# Altium PCB Pcb1.PcbDoc
Units mm, origin at the board's own origin, x right, y up, seen from the top; angles counter-clockwise.
Board outline 25.4 x 57.15 mm, 2 copper layers (Top Layer, Bottom Layer), stack 1.569 mm thick; 49 components, 56 nets, 183 pads, 195 vias.
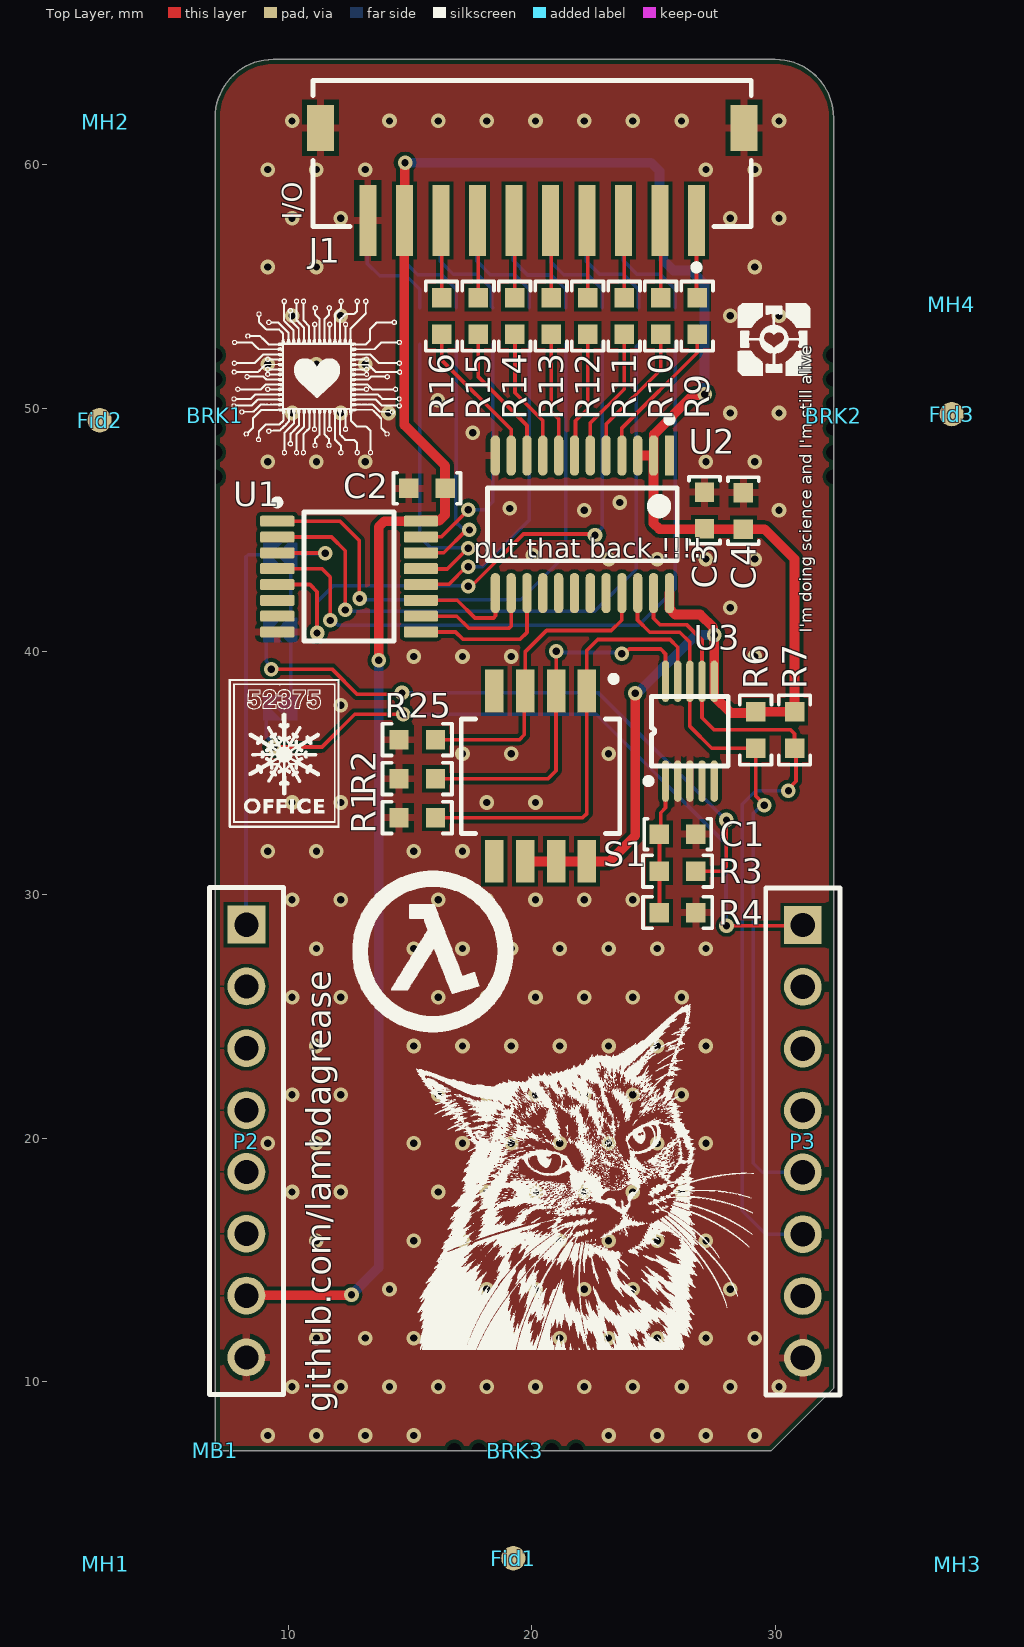
[diagram p0: Top Layer view]
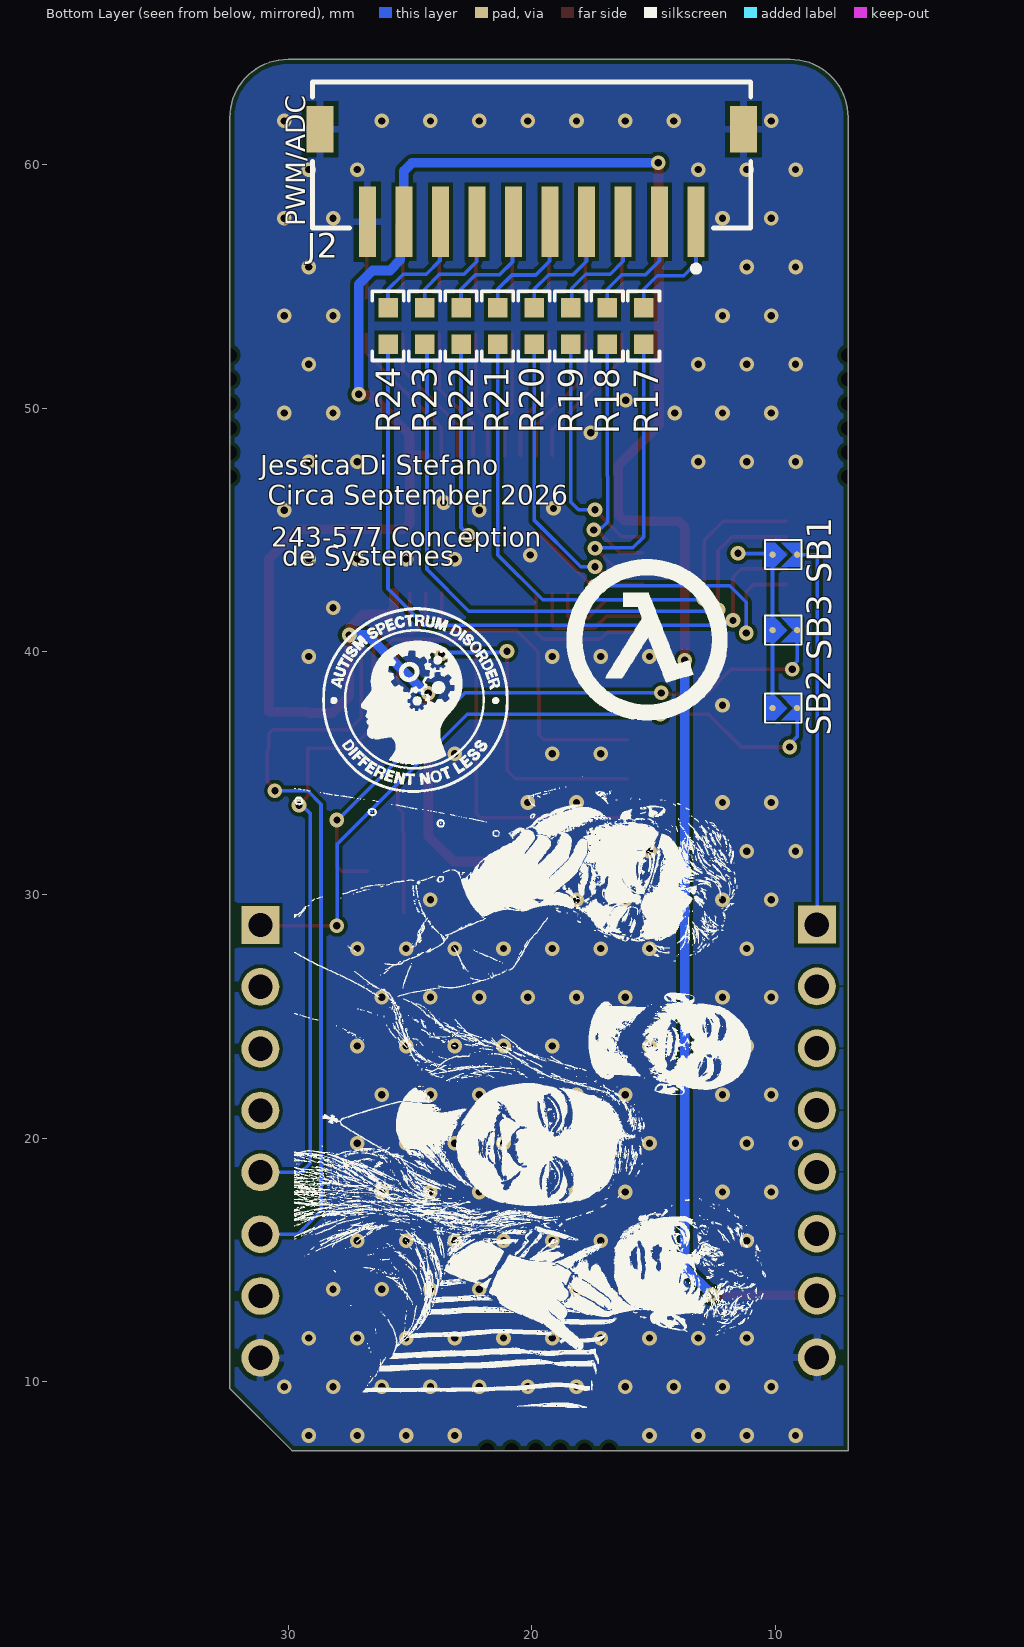
[diagram p1: Bottom Layer view, seen from below]

## Layer stack, top to bottom
Top Solder: solder mask 0.0254, SM-001, Dk 4
Top Layer: signal copper 0.035
Dielectric 1: core 1.4986, Core-043, Dk 4.3
Bottom Layer: signal copper 0.035
Bottom Solder: solder mask 0.0254, SM-001, Dk 4

## Board outline
7,7.175 29.85,7.175 32.4,9.725 32.4,61.929 ccw(c30.004,61.929) 30.004,64.325 9.385,64.325 ccw(c9.385,61.94) 7,61.94

## Design rules (kind name [scope] priority, off if disabled: settings)
BoardOutlineClearance [All] p1: gap=0.2 ignorepadtopadclearanceinfootprint=FALSE
Clearance [All] p1: gap=0.15 ignorepadtopadclearanceinfootprint=FALSE
ComponentClearance [All] p1: gap=0.254 collisioncheckmode=3 verticalgap=0.254 showdistances=FALSE donotcheckwithout3dbody=TRUE
DiffPairsRouting [All] p1: maxlimit=0.125 minlimit=0.125 mostfreqgap=0.125 toplayer_minwidth=0.125 toplayer_maxwidth=0.125 toplayer_prefwidth=0.125 bottomlayer_minwidth=0.125 bottomlayer_maxwidth=0.125 bottomlayer_prefwidth=0.125 maxuncoupledlength=15
HoleSize [All] p1: absolutevalues=TRUE maxlimit=5 minlimit=0.2 maxpercent=80.000 minpercent=20.000
HoleToHoleClearance [All] p1: gap=0.3 allowstackedmicrovias=TRUE
MinimumSolderMaskSliver [All] p1: minsoldermaskwidth=0.075
PlaneClearance [All] p1: clearance=0.5
PlaneConnect [All] p1: pad.planeconnectstyle=Relief pad.reliefexpansion=0.508 pad.reliefentries=4 pad.reliefconductorwidth=0.254 pad.reliefairgap=0.254 via.planeconnectstyle=Direct via.reliefexpansion=0.508 via.reliefentries=4 via.reliefconductorwidth=0.254 via.reliefairgap=0.254
PolygonConnect [All] p1: thpad.connectstyle=Relief thpad.reliefconductorwidth=0.3 thpad.reliefentries=4 thpad.polygonreliefangle="90 Angle" thpad.airgapwidth=0.2 smdpad.connectstyle=Relief smdpad.reliefconductorwidth=0.3 smdpad.reliefentries=4 smdpad.polygonreliefangle="90 Angle" smdpad.airgapwidth=0.2 via.connectstyle=Direct via.reliefconductorwidth=0.254 via.reliefentries=4 via.polygonreliefangle="90 Angle" via.airgapwidth=0.254
RoutingVias [All] p1: holewidth=0.3 width=0.6 viastyle="Through Hole" minholewidth=0.3 minwidth=0.6 maxholewidth=0.3 maxwidth=0.6
SilkToSilkClearance [All] p1: silktosilkclearance=0
SilkToSolderMaskClearance [IsPad] p1: minsilkscreentomaskgap=0 clearancetoexposedcopper=TRUE
SolderMaskExpansion [All] p1: expansion=0.1 istentingtop=FALSE
SupplyNets "Schematic Supply Nets_2" [InNet('VCC_3V3')] p1: voltage=0.000
SupplyNets "Schematic Supply Nets_1" [InNet('GND')] p2: voltage=0.000
SupplyNets "Schematic Supply Nets" [InNet('VCC_5V')] p3: voltage=0.000
Width Width_1 [InNet('VCC_3V3')] p1: maxlimit=0.4 minlimit=0.4 preferedwidth=0.4 minimp=50.000000 maximp=50.000000 favimp=50.000000
Width [All] p2: maxlimit=0.15 minlimit=0.15 preferedwidth=0.15
21 further rules are at their usual default settings.

## Classes and differential pairs
component class U_ResSelect: R17 R18 R19 R20 R21 R22 R23 R24 SB1 SB2 SB3 U1
component class U_MikroBus: MB1 P2 P3
component class U_IOExpander: C4 R6 R7 R9 R10 R11 R12 R13 R14 R15 R16 R25 U2
component class U_Adc_I2C: R1 R2 R3 R4 S1 U3
component class HeadSheet: BRK1 BRK2 BRK3 Fid1 Fid2 Fid3 J1 J2 MH1 MH2 MH3 MH4

## Components (designator, comment, footprint, x,y, rotation, side; value= is the part's Value field where it differs from the comment)
BRK1 "DNP" BK_CRACK1B_M 7,47.175 r270 top value="Mouse Bites 2mm"
BRK2 "DNP" BK_CRACK1B_M 32.4,52.175 r90 top value="Mouse Bites 2mm"
BRK3 "DNP" BK_CRACK1B_M 21.825,7.175 r0 top value="Mouse Bites 2mm"
C1 "CAP CER 100nF 50V 0603" C_1608[0603] 26,32.5 r180 top value=100nF
C2 "CAP CER 100nF 50V 0603" C_1608[0603] 15.7,46.7 r0 top value=100nF
C3 "CAP CER 100nF 50V 0603" C_1608[0603] 27.1,45.8 r270 top value=100nF
C4 "CAP CER 2.2uF 10V X7R 0603" C_1608[0603] 28.7,45.775 r270 top value=2.2uF
Fid1 "DNP" FD_Fiducial 19.25,2.75 r0 top value="Fiducial mark"
Fid2 "DNP" FD_Fiducial 2.25,49.5 r90 top value="Fiducial mark"
Fid3 "DNP" FD_Fiducial 37.25,49.75 r90 top value="Fiducial mark"
J1 "HC-ZH-10PWT" J_S10B-ZR-SM4 20.02,60.455 r180 top locked
J2 "HC-ZH-10PWT" J_S10B-ZR-SM4 20,60.4 r0 bottom locked
MB1 "mikroBUS" mikroBUS-Large-No-Connector 7,7.175 r0 top locked
MH1 "DNP" MP_M-Hole_M2-NonPlated#1 2.5,2.5 r0 top value="Mounting Hole 2mm non plated"
MH2 "DNP" MP_M-Hole_M2-NonPlated#1 2.5,61.75 r90 top value="Mounting Hole 2mm non plated"
MH3 "DNP" MP_M-Hole_M2-NonPlated#1 37.5,2.5 r90 top value="Mounting Hole 2mm non plated"
MH4 "DNP" MP_M-Hole_M2-NonPlated#2 37.25,54.5 r90 top value="Mounting Hole 2mm non plated"
P2 "ESQ-108-14-T-S" CONN_SKT_01X08_100MIL-ELEVATED-LONGPIN 8.283,19.89 r270 top
P3 "ESQ-108-14-T-S" CONN_SKT_01X08_100MIL-ELEVATED-LONGPIN 31.141,19.872 r270 top locked
R1 "Res 10k 1% 0603" R_1608[0603] 15.3,33.175 r0 top value=10k
R2 "Res 10k 1% 0603" R_1608[0603] 15.3,34.775 r0 top value=10k
R3 "Res 1k 1% 0603" R_1608[0603] 26,30.975 r180 top value=1k
R4 "Res 1k 1% 0603" R_1608[0603] 26,29.275 r180 top value=1k
R6 "Res 10k 1% 0603" R_1608[0603] 29.2,36.775 r90 top value=10k
R7 "Res 10k 1% 0603" R_1608[0603] 30.8,36.775 r90 top value=10k
R9 "Res 100R 1% 0603" R_1608[0603] 26.8,53.775 r90 top value=100R
R10 "Res 100R 1% 0603" R_1608[0603] 25.3,53.775 r90 top value=100R
R11 "Res 100R 1% 0603" R_1608[0603] 23.8,53.775 r90 top value=100R
R12 "Res 100R 1% 0603" R_1608[0603] 22.3,53.775 r90 top value=100R
R13 "Res 100R 1% 0603" R_1608[0603] 20.8,53.775 r90 top value=100R
R14 "Res 100R 1% 0603" R_1608[0603] 19.3,53.775 r90 top value=100R
R15 "Res 100R 1% 0603" R_1608[0603] 17.8,53.775 r90 top value=100R
R16 "Res 100R 1% 0603" R_1608[0603] 16.3,53.775 r90 top value=100R
R17 "Res 100R 1% 0603" R_1608[0603] 15.4,53.375 r90 bottom value=100R
R18 "Res 100R 1% 0603" R_1608[0603] 16.9,53.375 r90 bottom value=100R
R19 "Res 100R 1% 0603" R_1608[0603] 18.4,53.375 r90 bottom value=100R
R20 "Res 100R 1% 0603" R_1608[0603] 19.9,53.375 r90 bottom value=100R
R21 "Res 100R 1% 0603" R_1608[0603] 21.4,53.375 r90 bottom value=100R
R22 "Res 100R 1% 0603" R_1608[0603] 22.9,53.375 r90 bottom value=100R
R23 "Res 100R 1% 0603" R_1608[0603] 24.4,53.375 r90 bottom value=100R
R24 "Res 100R 1% 0603" R_1608[0603] 25.9,53.375 r90 bottom value=100R
R25 "Res 1k 1% 0603" R_1608[0603] 15.3,36.375 r0 top value=1k
S1 "DSHP04TSGER" S_DIP_SWITCH_50MIL_4POS 20.367,34.875 r180 top locked value="DIP Switch 4pos"
SB1 "Open" SB-TINY-OPEN 9.6,43.975 r180 bottom
SB2 "Open" SB-TINY-OPEN 9.6,37.675 r180 bottom
SB3 "Open" SB-TINY-OPEN 9.6,40.875 r180 bottom
U1 "TMUX1308PWR" U_TSSOP65P500X450-16 12.5,43.075 r270 top locked
U2 "PCAL6416APW,118" U_TSSOP24_SOT355-1-IPC_B 22.083,45.223 r180 top locked
U3 "MCP3423-E/UN" U_MSOP50P300X500-10(RM-10)_WO-TP 26.5,36.725 r0 top locked

## Footprints (in the part's own frame and the unit in brackets; to place one, negate y for a bottom-side part, rotate by r counter-clockwise, add the part's x,y. Pads: shape width x height; smd on the part's side, far side on the other; paste and mask are expansions set on the pad)
BK_CRACK1B_M [mm] "Cracker métrique NPTH"
  round 0 hole 0.6 unplated: 1(0,0) 2(-1,0) 3(-2,0) 4(-3,0) 5(-4,0) 6(-5,0)
C_1608[0603] [mm] "Capacitor MLCC; Body 1.6 x 0.8 mm (LxW typ)"
  rect 0.8x0.8 smd: 1(-0.75,0) 2(0.75,0)
  silkscreen extent -1.38,-0.64 1.38,0.64, body extent -0.8,-0.4 0.8,0.4, height 0.8
CONN_SKT_01X08_100MIL-ELEVATED-LONGPIN [mm] "SQ Post Socket, 1x8 Pins, Vertical, 2.54mm Pitch, Female"
  rect 1.55x1.55 hole 1: 1(-8.89,0)
  round 1.55 hole 1: 2(-6.35,0) 3(-3.81,0) 4(-1.27,0) 5(1.27,0) 6(3.81,0) 7(6.35,0) 8(8.89,0)
  silkscreen extent -10.41,-1.52 10.42,1.52, body extent -10.66,-1.37 10.66,1.37, height 0.25
FD_Fiducial [mm] "Fiducial"
  round 1 smd paste-0.5 mask+1: 1(0,0)
J_S10B-ZR-SM4 [mm] "CONN HEADER SMD 10POS 1MM5 RA"
  rect 0.7x2.9 smd paste+0 mask+0: 1(-6.75,2.75) 2(-5.25,2.75) 3(-3.75,2.75) 4(-2.25,2.75) 5(-0.75,2.75) 6(0.75,2.75) 7(2.25,2.75) 8(3.75,2.75) 9(5.25,2.75) 10(6.75,2.75)
  rect 1.1x1.9 smd paste+0 mask+0: 11(8.7,-1.05) 12(-8.7,-1.05)
  silkscreen extent -9,-3 9,4.8, body extent -9.35,-3.1 9.35,4.3, height 0.25
mikroBUS-Large-No-Connector [mm]
MP_M-Hole_M2-NonPlated#1 [mm] "Monting Hole M2 non plated"
  round 1.5 hole 2 unplated paste-2539.97: 1(0,0)
MP_M-Hole_M2-NonPlated#2 [mm] "Monting Hole M2 non plated"
  round 1.5 hole 2 unplated paste-2539.97: 1(-0.25,0)
R_1608[0603] [mm] "Chip Resistor; Body 1.6 x 0.8 mm (LxW typ)"
  rect 0.8x0.8 smd: 1(-0.75,0) 2(0.75,0)
  silkscreen extent -1.43,-0.65 1.43,0.65, body extent -0.77,-0.42 0.78,0.43, height 0.45
S_DIP_SWITCH_50MIL_4POS [mm] "Dip switch 4pos, pitch 1.27mm, height 1.55mm"
  rect 0.76x1.75 smd paste+0 mask+0: 1(-1.903,-3.5) 2(-0.633,-3.5) 3(0.637,-3.5) 4(1.907,-3.5) 5(1.907,3.5) 6(0.637,3.5) 7(-0.633,3.5) 8(-1.903,3.5)
  silkscreen extent -3.25,-4.12 3.26,2.35, body extent -3.35,-3.8 3.36,3.8, height 0.25
SB-TINY-OPEN [mil]
  round 10 smd paste-10 mask+0.04: 1(-19.84,0)
  round 10 smd paste-10.08 mask+0.04: 2(19.84,0)
  Top Layer region: -30.16,-19.68 -30.16,19.68 -15.91,19.68 3.78,0 -15.91,-19.68
  Top Layer region: -6.06,19.68 13.62,0 -6.06,-19.68 24.84,-19.68 24.84,19.68
  silkscreen extent -32,-24 27,24
U_MSOP50P300X500-10(RM-10)_WO-TP [mm] "Shrink Small Outline; 10 Leads; Body Width 3 mm; Pitch 0.5 mm"
  oval 0.3x1.7 smd mask+0.05: 1(-1,-2.05) 2(-0.5,-2.05) 3(0,-2.05) 4(0.5,-2.05) 5(1,-2.05) 6(1,2.05) 7(0.5,2.05) 8(0,2.05) 9(-0.5,2.05) 10(-1,2.05)
  silkscreen extent -1.82,-2.17 1.58,1.43, body extent -1.6,-2.58 1.6,2.57, height 1.09
U_TSSOP24_SOT355-1-IPC_B [mm]
  rect 0.381x1.655 smd paste+0 mask+0: 1(-3.575,-2.825)
  rrect100% 0.381x1.655 smd paste+0 mask+0: 2(-2.925,-2.825) 3(-2.275,-2.825) 4(-1.625,-2.825) 5(-0.975,-2.825) 6(-0.325,-2.825) 7(0.325,-2.825) 8(0.975,-2.825) 9(1.625,-2.825) 10(2.275,-2.825) 11(2.925,-2.825) 12(3.575,-2.825) 13(3.575,2.825) 14(2.925,2.825) 15(2.275,2.825) 16(1.625,2.825) 17(0.975,2.825) 18(0.325,2.825) 19(-0.325,2.825) 20(-0.975,2.825) 21(-1.625,2.825) 22(-2.275,2.825) 23(-2.925,2.825) 24(-3.575,2.825)
  silkscreen extent -3.9,-4.43 3.9,1.5, body extent -4.15,-3.9 4.15,3.9, height 0.25
U_TSSOP65P500X450-16 [mm] "SOP, 16-Leads, Body 5x4.5mm, Pitch 0.65mm, IPC Medium Density"
  rrect22% 0.45x1.4 smd: 1(-2.275,-2.95) 2(-1.625,-2.95) 3(-0.975,-2.95) 4(-0.325,-2.95) 5(0.325,-2.95) 6(0.975,-2.95) 7(1.625,-2.95) 8(2.275,-2.95) 9(2.275,2.95) 10(1.625,2.95) 11(0.975,2.95) 12(0.325,2.95) 13(-0.325,2.95) 14(-0.975,2.95) 15(-1.625,2.95) 16(-2.275,2.95)
  silkscreen extent -3.17,-3.07 2.65,1.85, body extent -3,-4.35 3,4.35, height 0.25

## Part data
BRK1 BRK2 BRK3: library part BK_BREAKOUT_2MM, "Mouse Bites", Mounting Technology=N/A
C1 C2 C3: library part CAP002, "Capacitor type 1", Dielectric=X7R, Manufacturer 1=Yageo, Manufacturer Part Number 1=CC0603KRX7R9BB104, Rated Voltage=50V, Supplier Part Number 1=C14663, Tolerance=10%, Code CEGEP=COND0143SM, LibRef=CAP002, Mounting Technology=SMT, Supplier 1=LCSC
C4: library part CAP022, "Capacitor type 1", Dielectric=X7R, Manufacturer 1=Samsung, Manufacturer Part Number 1=CL10B225KP8NNNC, Rated Voltage=10V, Supplier Part Number 1=C100082, Tolerance=10%, LibRef=CAP022, Mounting Technology=SMT, Supplier 1=LCSC
Fid1 Fid2 Fid3: library part Fiducial, "Fiducial mark for alignement and Pick&Place", Mounting Technology=N/A
J1 J2: library part CONN-1MM5-01X10-S10B-H-SMT, "CONN wire to board SMT R/A 10POS 1.5mm", Manufacturer 1=HCTL, Manufacturer 2=JST, Manufacturer Part Number 2=S10B-ZR-SM4A-TF(LF)(SN), Supplier Part Number 1=C2845432, Manufacturer Part Number 1=HC-ZH-10PWT, Mounting Technology=SMT, Supplier 1=LCSC, Supplier 2=LCSC, Supplier 3=Digikey, Supplier Part Number 2=C5149249, Supplier Part Number 3=455-1700-1-ND
MB1: library part "mikroBUS compatible add-on board", "mikroBUS compatible add-on board"
MH1 MH2 MH3 MH4: library part MH-2MM_NP, "Mounting Hole 2mm non plated", Supplier Part Number 1=N/A, Manufacturer Part Number 1=DNP, Mounting Technology=N/A
P2 P3: library part CONN-100MIL-SKT-01X08_ELEVATED_LONGPIN, "CONN SOCKET 8pos 100mils Elevated", Manufacturer 1=Samtec, Supplier Part Number 1=SAM9303-ND, Manufacturer Part Number 1=ESQ-108-14-T-S, Mounting Technology=TH, Supplier 1=Digikey
R1 R2 R6 R7: library part RES001, "Resistor type 1", Manufacturer 1=Yageo, Manufacturer Part Number 1=RC0603FR-0710KL, Max Working Voltage=75V, Supplier Part Number 1=C98220, Tolerance=1%, Code CEGEP=RESI0238-0603, LibRef=RES001, Mounting Technology=SMT, Puissance=1/10W, Supplier 1=LCSC
R3 R4 R25: library part RES015, "Resistor type 1", Manufacturer 1=Yageo, Manufacturer Part Number 1=RC0603FR-071KL, Max Working Voltage=75V, Supplier Part Number 1=C22548, Tolerance=1%, LibRef=RES015, Mounting Technology=SMT, Puissance=1/10W, Supplier 1=LCSC
R9 R10 R11 R12 R13 R14 R15 R16 R17 R18 R19 R20 R21 R22 R23 R24: library part RES029, "Resistor type 1", Manufacturer 1=Yageo, Manufacturer Part Number 1=RC0603FR-07100RL, Max Working Voltage=75V, Supplier Part Number 1=C105588, Tolerance=1%, LibRef=RES029, Mounting Technology=SMT, Puissance=1/10W, Supplier 1=LCSC
S1: library part SW_DIP_50MIL_4POS, "SWITCH DIP SLIDE SPST 25MA 24V, pitch 1.27mm, height 1.55mm", Manufacturer 1=kangshen, Manufacturer 2=Omron, Manufacturer Part Number 2=A6H-4102-PM, Supplier Part Number 1=C3293144, Manufacturer Part Number 1=DSHP04TSGER, Mounting Technology=SMT, Supplier 1=LCSC, Supplier 2=LCSC, Supplier 3=Digikey, Supplier Part Number 2=C2733274, Supplier Part Number 3=39-A6H-4102-PMCT-ND
SB1 SB2 SB3: library part Solder-Jumper-Open, "Solder Jumper"
U1: library part U_TMUX1308PWR, "IC MUX 8:1 195OHM 16TSSOP", Manufacturer 1=TI, Supplier Part Number 1=C970231, Manufacturer Part Number 1=TMUX1308PWR, Mounting Technology=SMT, Supplier 1=LCSC, Supplier 2=Digikey, Supplier Part Number 2=296-TMUX1308PWRCT-ND
U2: library part U_PCAL6416APW, "IC I/O EXPANDER 16BIT 24TSSOP", Manufacturer 1="Texas Instruments", Manufacturer 2="NXP Semiconductors", Manufacturer Part Number 1=TCA6416APWR, Supplier Part Number 1=C130203, Manufacturer Part Number 2=PCAL6416APW,118, Mounting Technology=SMT, Supplier 1=LCSC, Supplier 2=LCSC, Supplier 3=Digikey, Supplier Part Number 2=C2652299, Supplier Part Number 3=568-9922-1-ND
U3: library part U_MCP3423-E/UN, "CAN Controller Stand-Alone With SPI, 18-Pin PDIP", Manufacturer 1=Microchip, Supplier Part Number 1=C220864, Manufacturer Part Number 1=MCP3423-E/UN, Mounting Technology=SMT, Supplier 1=LCSC, Supplier 2=Digikey, Supplier Part Number 2=MCP3423-E/UN-ND

## Via types
v1: diameter 0.6, hole 0.3, Top Layer to Bottom Layer, tented both sides, 195 vias

## Nets (pads, with @x,y where several pads share a name; then routed paths per layer and width w, separated by ;. In a path a pad name is that pad's centre, name@x,y a point inside that pad or via, vN(x,y) a via of type N, cw(c..) or ccw(c..) an arc to the next point about the centre after c; other vN are vias at no path point)
A0: U1.11 U2.13 | length 4.3
  Top Layer w0.15: U1.11 16.948,42.1 17.672,41.376 18.429,41.376 18.517,41.463 18.517,42.388 U2.13
A1: U1.10 U2.14 | length 5.3
  Top Layer w0.15: U1.10 16.925,41.45 17.414,40.961 19.07,40.961 19.158,41.048 U2.14
A2: U1.9 U2.15 | length 6.2
  Top Layer w0.15: U1.9 16.875,40.8 17.177,40.498 19.523,40.498 19.808,40.783 U2.15
ADC_18_1: R3.1 SB3.2 | length 26.2
  Top Layer w0.15: v1(9.3,39.275) 11.8,39.275 12.839,38.236 14.611,38.236 v1(14.672,38.297) ; R3.1 27.8,30.975 28,31.175 v1(28,33.075)
  Bottom Layer w0.15: SB3.2 9.096,39.601 9.3,39.397 v1(9.3,39.275) ; v1(14.672,38.297) 22.747,38.297 27.97,33.075 v1(28,33.075)
AN_1: P2.1 SB1.2 | length 16
  Bottom Layer w0.15: P2.1 8.267,28.796 8.267,43.887 8.355,43.975 SB1.2
CS: P2.3
GND: C1.1 C2.1 C3.1 C4.1 J1.10 J1.11 J1.12 J2.10 J2.11 J2.12 P2.8 P3.8 R1.1 R2.1 R4.1 R25.1 U1.8 U2.12 U3.2 U3.3
  other v1: 9.159,7.795 11.159,7.795 13.159,7.795 15.159,7.795 23.159,7.795 25.159,7.795 27.159,7.795 29.159,7.795 10.159,9.795 12.159,9.795 14.159,9.795 16.159,9.795 18.159,9.795 20.159,9.795 22.159,9.795 24.159,9.795 26.159,9.795 28.159,9.795 30.159,9.795 11.159,11.795 13.159,11.795 15.159,11.795 17.159,11.795 19.159,11.795 21.159,11.795 23.159,11.795 25.159,11.795 27.159,11.795 29.159,11.795 14.159,13.795 16.159,13.795 18.159,13.795 20.159,13.795 22.159,13.795 24.159,13.795 26.159,13.795 28.159,13.795 11.159,15.795 15.159,15.795 17.159,15.795 19.159,15.795 21.159,15.795 23.159,15.795 25.159,15.795 27.159,15.795 10.159,17.795 12.159,17.795 16.159,17.795 18.159,17.795 20.159,17.795 22.159,17.795 24.159,17.795 26.159,17.795 9.159,19.795 11.159,19.795 15.159,19.795 17.159,19.795 19.159,19.795 21.159,19.795 23.159,19.795 25.159,19.795 27.159,19.795 10.159,21.795 12.159,21.795 16.159,21.795 18.159,21.795 20.159,21.795 22.159,21.795 24.159,21.795 26.159,21.795 11.159,23.795 15.159,23.795 17.159,23.795 19.159,23.795 21.159,23.795 23.159,23.795 25.159,23.795 27.159,23.795 10.159,25.795 12.159,25.795 16.159,25.795 18.159,25.795 20.159,25.795 22.159,25.795 24.159,25.795 26.159,25.795 11.159,27.795 15.159,27.795 17.159,27.795 19.159,27.795 21.159,27.795 23.159,27.795 25.159,27.795 27.159,27.795 10.159,29.795 12.159,29.795 16.159,29.795 18.159,29.795 20.159,29.795 22.159,29.795 24.159,29.795 9.159,31.795 11.159,31.795 15.159,31.795 17.159,31.795 10.159,33.795 12.159,33.795 18.159,33.795 20.159,33.795 17.159,35.795 19.159,35.795 23.159,35.795 12.159,37.795 15.159,39.795 17.159,39.795 19.159,39.795 29.159,39.795 28.159,41.795 23.159,43.795 25.159,43.795 27.159,43.795 29.159,43.795 20.053,43.96 22.159,45.795 30.159,45.795 19.104,45.876 23.618,46.12 9.159,47.795 11.159,47.795 13.159,47.795 27.159,47.795 29.159,47.795 17.579,48.99 10.159,49.795 12.159,49.795 14.12,49.795 28.159,49.795 30.159,49.795 16.14,50.324 9.159,51.795 11.159,51.795 13.159,51.795 29.159,51.795 10.159,53.795 12.159,53.795 28.159,53.795 30.159,53.795 9.159,55.795 11.159,55.795 29.159,55.795 10.159,57.795 12.159,57.795 28.159,57.795 30.159,57.795 9.159,59.795 11.159,59.795 13.159,59.795 27.159,59.795 29.159,59.795 10.159,61.795 14.159,61.795 16.159,61.795 18.159,61.795 20.159,61.795 22.159,61.795 24.159,61.795 26.159,61.795 30.159,61.795
INT: P3.2
MISO: P2.5
MOSI: P2.6
NetC1_2: C1.2 R3.2 R4.2 U3.1 | length 5.5
  Top Layer w0.15: R4.2 R3.2 25.25,32.575 25.3,32.625 25.3,33.375 25.5,33.575 U3.1
NetR1_2: R1.2 S1.1 U3.9 | length 18.4
  Top Layer w0.15: R1.2 22.1,33.175 22.27,33.345 S1.1 22.27,40.045 22.716,40.491 25.684,40.491 26,40.175 U3.9
NetR2_2: R2.2 S1.2 U3.10 | length 15.8
  Top Layer w0.15: R2.2 20.675,34.775 21,35.1 S1.2 21.012,38.387 v1(21.012,40.01) ; v1(23.7,39.9) 23.813,39.9 24.013,40.1 25.3,40.1 25.5,39.9 U3.10
  Bottom Layer w0.15: v1(21.012,40.01) 21.067,39.955 23.645,39.955 v1(23.7,39.9)
NetR9_1: R9.1 U2.4 | length 6.3
  Top Layer w0.15: U2.4 23.708,49.183 26.799,52.274 R9.1
NetR10_1: R10.1 U2.5 | length 5.9
  Top Layer w0.15: U2.5 23.058,49.333 25.3,51.575 R10.1
NetR11_1: R11.1 U2.6 | length 5.6
  Top Layer w0.15: U2.6 22.408,49.383 23.8,50.775 R11.1
NetR12_1: R12.1 U2.7 | length 5.2
  Top Layer w0.15: U2.7 21.8,48.091 21.8,49.475 22.3,49.975 R12.1
NetR13_1: R13.1 U2.8 | length 5.1
  Top Layer w0.15: R13.1 20.8,49.857 21.108,49.549 U2.8
NetR14_1: R14.1 U2.9 | length 5.5
  Top Layer w0.15: R14.1 19.318,53.007 19.318,50.627 20.458,49.487 U2.9
NetR15_1: R15.1 U2.10 | length 5.8
  Top Layer w0.15: R15.1 17.8,51.291 19.808,49.283 U2.10
NetR16_1: R16.1 U2.11 | length 6.2
  Top Layer w0.15: R16.1 16.3,51.975 19.158,49.117 U2.11
NetR17_1: R17.1 U1.13 | length 12.4
  Top Layer w0.15: U1.13 15.462,43.387 16.53,43.387 17.388,44.245 v1(17.399,44.245)
  Bottom Layer w0.15: R17.1 15.4,44.705 15.848,44.257 17.387,44.257 v1(17.399,44.245)
NetR18_1: R18.1 U1.14 | length 10.4
  Top Layer w0.15: U1.14 16.384,44.05 17.327,44.994 v1(17.444,44.994)
  Bottom Layer w0.15: R18.1 16.9,47.227 16.875,47.202 16.875,45.323 17.118,45.08 17.358,45.08 v1(17.444,44.994)
NetR19_1: R19.1 U1.15 | length 10
  Top Layer w0.15: U1.15 15.462,44.712 16.298,44.712 17.4,45.814 v1(17.4,45.825)
  Bottom Layer w0.15: v1(17.4,45.825) 18.073,45.825 18.4,46.152 R19.1
NetR20_1: R20.1 U1.12 | length 12.8
  Top Layer w0.15: U1.12 15.462,42.762 16.602,42.762 17.315,43.475 v1(17.4,43.475)
  Bottom Layer w0.15: v1(17.4,43.475) 17.978,43.475 19.9,45.397 R20.1
NetR21_1: R21.1 U1.1 | length 24
  Top Layer w0.15: U1.1 12.125,45.35 12.916,44.559 12.916,42.191 v1(12.93,42.177)
  Bottom Layer w0.15: v1(12.93,42.177) 12.983,42.124 19.549,42.124 21.4,43.975 R21.1
NetR22_1: R22.1 U1.5 | length 25.3
  Top Layer w0.15: U1.5 10.891,42.75 11.185,42.456 v1(11.185,40.761) ; v1(17.4,42.675) 17.514,42.675 19.662,44.824 22.551,44.824 v1(22.6,44.775)
  Bottom Layer w0.15: v1(11.185,40.761) 11.185,42.025 11.861,42.702 17.373,42.702 v1(17.4,42.675) ; v1(22.6,44.775) 22.6,44.788 22.9,45.088 R22.1
NetR23_1: R23.1 U1.2 | length 27.4
  Top Layer w0.15: U1.2 11.776,44.7 12.344,44.132 v1(12.344,41.706)
  Bottom Layer w0.15: v1(12.344,41.706) 12.398,41.652 22.579,41.652 24.3,43.373 24.3,52.525 R23.1
NetR24_1: R24.1 U1.4 | length 29
  Top Layer w0.15: U1.4 11.385,43.4 11.73,43.055 v1(11.73,41.276)
  Bottom Layer w0.15: v1(11.73,41.276) 11.842,41.276 12.042,41.075 24.396,41.075 25.9,42.579 R24.1
NetR25_2: R25.2 S1.3 U2.21 | length 12.8
  Top Layer w0.15: R25.2 19.5,36.375 19.7,36.575 19.7,38.345 S1.3 19.73,39.977 20.613,40.861 23.271,40.861 23.695,41.285 23.695,42.385 U2.21
NetSB1_1: SB1.1 SB2.1 SB3.1 U1.3 | length 9.7
  Top Layer w0.15: U1.3 9.558,44.042 11.516,44.042 v1(11.523,44.035)
  Bottom Layer w0.15: SB2.1 SB3.1 SB1.1 10.132,43.975 10.171,44.014 11.502,44.014 v1(11.523,44.035)
P0_0: J1.1 R9.2 | length 3.2
  Top Layer w0.15: J1.1 26.77,54.555 R9.2
P0_1_1: J1.2 R10.2 | length 3.2
  Top Layer w0.15: J1.2 25.3,57.675 R10.2
P0_2_1: J1.3 R11.2 | length 3.2
  Top Layer w0.15: J1.3 23.8,57.675 R11.2
P0_3_1: J1.4 R12.2 | length 3.2
  Top Layer w0.15: J1.4 22.3,57.675 R12.2
P0_4_1: J1.5 R13.2 | length 3.2
  Top Layer w0.15: J1.5 20.8,57.675 R13.2
P0_5_1: J1.6 R14.2 | length 3.2
  Top Layer w0.15: J1.6 19.3,57.675 R14.2
P0_6_1: J1.7 R15.2 | length 3.2
  Top Layer w0.15: J1.7 17.8,57.675 R15.2
P0_7_1: J1.8 R16.2 | length 3.2
  Top Layer w0.15: J1.8 16.3,57.675 R16.2
PWM_1: P3.1 SB2.2 | length 29.6
  Top Layer w0.15: v1(9.4,36.075) 11.385,36.075 12.736,37.426 v1(14.72,37.426) ; v1(28.002,28.734) 31.113,28.734 P3.1
  Bottom Layer w0.15: SB2.2 9.096,36.501 9.4,36.197 v1(9.4,36.075) ; v1(14.72,37.426) 22.649,37.426 27.985,32.09 27.985,28.751 v1(28.002,28.734)
RST: P2.2
RX: P3.4
S0: J2.1 R17.2 | length 5.1
  Bottom Layer w0.15: J2.1 13.25,55.939 13.757,55.432 14.843,55.432 15.4,54.875 R17.2
S1_1: J2.2 R18.2 | length 5
  Bottom Layer w0.15: J2.2 14.75,56.046 15.321,55.475 16.3,55.475 16.9,54.875 R18.2
S2_1: J2.3 R19.2 | length 5
  Bottom Layer w0.15: J2.3 16.25,56.025 16.775,55.5 17.775,55.5 18.35,54.925 18.35,54.175 R19.2
S3_1: J2.4 R20.2 | length 5
  Bottom Layer w0.15: J2.4 17.75,56.025 18.3,55.475 19.3,55.475 19.9,54.875 R20.2
S4_1: J2.5 R21.2 | length 5
  Bottom Layer w0.15: J2.5 19.25,56.049 19.832,55.467 20.808,55.467 21.4,54.875 R21.2
S5_1: J2.6 R22.2 | length 5
  Bottom Layer w0.15: J2.6 20.789,57.611 20.789,56 21.318,55.471 22.304,55.471 22.9,54.875 R22.2
S6_1: J2.7 R23.2 | length 5
  Bottom Layer w0.15: J2.7 22.255,57.645 22.255,56.02 22.784,55.491 23.784,55.491 24.39,54.885 24.39,54.135 R23.2
S7_1: J2.8 R24.2 | length 5
  Bottom Layer w0.15: J2.8 23.765,57.635 23.765,56.063 24.328,55.5 25.275,55.5 25.9,54.875 R24.2
SCK: P2.4
SCL_1: P3.5 R6.1 U2.22 U3.8 | length 29.9
  Top Layer w0.15: U2.22 24.347,42.387 24.347,41.296 24.851,40.791 26.084,40.791 26.5,40.375 U3.8 26.5,36.921 27.396,36.025 R6.1 29.2,34.063 29.558,33.705 v1(29.558,33.679) ; P3.5@31.114,18.575 P3.5
  Bottom Layer w0.15: v1(29.558,33.679) 29.436,33.679 29.1,33.342 29.1,18.975 29.473,18.602 P3.5
SDA_1: P3.6 R7.1 U2.23 U3.7 | length 34.9
  Top Layer w0.15: U2.23 25.008,41.367 25.284,41.091 26.384,41.091 27,40.475 U3.7 27,37.28 27.491,36.789 30.634,36.789 30.8,36.623 R7.1 30.857,35.968 30.857,34.664 30.547,34.354 v1(30.547,34.278)
  Bottom Layer w0.15: v1(30.547,34.278) 30.544,34.275 29.2,34.275 28.654,33.729 28.654,17.021 29.613,16.062 P3.6
TX: P3.3
VCC_3V3: C2.2 C3.2 C4.2 J1.9 J2.9 P2.7 R6.2 R7.2 S1.6 S1.7 S1.8 U1.16 U2.2 U2.3 U2.24 U3.6 | length 119.4
  Top Layer w0.4: P2.7 8.3,13.558 12.583,13.558 v1(12.6,13.575) ; v1(13.717,39.636) 13.717,45.116 13.951,45.35 U1.16 15.475,45.375 16.209,45.375 16.443,45.609 16.443,47.04 16.443,47.632 14.77,49.305 J1.9 14.785,57.72 14.785,60.06 v1(14.8,60.075) ; S1.6 S1.7 S1.8 23.2,31.375 24.253,32.428 v1(24.253,38.287) ; U2.3 U2.2 ; U2.24 25.658,41.755 25.897,41.516 26.921,41.516 27.462,40.976 27.462,40.713 v1(27.5,40.675) 27.5,38.158 28.183,37.475 29.15,37.475 R6.2 R7.2 30.8,43.798 29.573,45.025 C4.2 27.1,45.025 25.242,45.025 25.008,45.259 U2.2 ; v1(27.104,50.571) 27.066,50.533 26.629,50.533 25.017,48.921 25.017,48.058 U2.2
  Bottom Layer w0.4: v1(12.6,13.575) 13.717,14.692 v1(13.717,39.636) ; v1(14.8,60.075) 24.916,60.075 25.25,59.741 J2.9 25.4,57.5 25.4,56.075 25.823,55.652 26.537,55.652 27.1,55.089 27.1,50.575 v1(27.104,50.571) ; v1(24.253,38.287) 24.307,38.287 24.407,38.387 24.455,38.387 26.743,40.675 v1(27.5,40.675)
VCC_5V: P3.7
pads on no net: BRK1.1 BRK1.2 BRK1.3 BRK1.4 BRK1.5 BRK1.6 BRK2.1 BRK2.2 BRK2.3 BRK2.4 BRK2.5 BRK2.6 BRK3.1 BRK3.2 BRK3.3 BRK3.4 BRK3.5 BRK3.6 Fid1.1 Fid2.1 Fid3.1 MH1.1 MH2.1 MH3.1 MH4.1 S1.4 S1.5 U1.6 U1.7 U2.1 U2.16 U2.17 U2.18 U2.19 U2.20 U3.4 U3.5

## Polygon pours and split planes (outlines as drawn)
GND on Bottom Layer "GND_L02_P001" (solid, remove dead copper, pour order 1): 7,7.175 7,61.94 cw(c9.385,61.94) 9.385,64.325 30.004,64.325 cw(c30.004,61.929) 32.4,61.929 32.4,9.715 29.86,7.175
GND on Top Layer "GND_L01_P000" (solid, remove dead copper, pour order 0): 7,7.175 7,61.94 cw(c9.385,61.94) 9.385,64.325 30.004,64.325 cw(c30.004,61.929) 32.4,61.929 32.4,9.715 29.86,7.175

## Silkscreen, mask and mechanical layers (free items; w line width, h text height)
Top Overlay:
  drawing of 804 lines, arcs and shapes, not listed
  text "I/O" at 10.55,57.725 h0.8 r90
  text "put that back !!!!" at 17.616,43.845 h0.8
  text "I'm doing science and I'm still alive" at 31.5,40.775 h0.5 r90
  text "github.com/lambdagrease" at 11.75,8.75 h1 r90
Bottom Overlay:
  drawing of 3703 lines, arcs and shapes, not listed
  text "PWM/ADC" at 29.3,57.475 h0.8 r270
  text "Jessica Di Stefano" at 31.15,47.25 h0.8
  text "Circa September 2026" at 30.85,46.017 h0.8
  text "243-577 Conception" at 30.7,44.3 h0.8
  text "de Systemes" at 30.25,43.517 h0.8
Board:
  lines w0.254: 0,0 40,0 40,60.6 40,64.325 34.399,64.325 34.399,52.175 ; 0.025,0.025 0.025,64.325 ; 0.075,64.325 5.001,64.325 5.001,52.175 ; 5.001,47.175 5.001,5.176 16.825,5.176 ; 9.385,64.325 ccw(c9.385,61.94) 7,61.94 7,7.175 29.85,7.175 32.4,9.725 32.4,61.925 ; 9.4,64.325 30.004,64.325 cw(c30.004,61.929) 32.4,61.929 ; 21.825,5.176 34.399,5.176 34.399,47.175

## Text inside footprints (layer, text, board x,y; h text height)
MB1: Top Assembly "5V" at 26.466,12.341 h1.2; Top Assembly "RX" at 26.3,19.961 h1.2; Top Assembly "SDI" at 9.787,14.902 h1.2; Top Assembly "INT" at 25.858,24.986 h1.2; Top Assembly "GND" at 24.453,9.738 h1.2; Top Assembly "SCL" at 25.024,17.462 h1.2; Top Assembly "TX" at 26.427,22.501 h1.2; Top Assembly "PWM" at 24.056,27.56 h1.2; Top Assembly "SCK" at 9.787,19.875 h1.2; Top Assembly "SDO" at 9.787,17.43 h1.2; Top Assembly "SDA" at 24.69,14.894 h1.2; Top Assembly "CS" at 9.787,22.491 h1.2; Top Assembly "3V3" at 9.787,12.387 h1.2; Top Assembly "GND" at 9.787,9.828 h1.2; Top Assembly "AN" at 24.3,17.981 h1.2; Top Assembly "RST" at 9.787,25.031 h1.2